# Altium PCB full-bridge-driver.PCBDOC
Units mm, origin at the board's own origin, x right, y up, seen from the top; angles counter-clockwise.
Board outline 535.3 x 360.3 mm, 2 copper layers (Top Layer, Bottom Layer); 32 components, 20 nets, 99 pads, 39 vias.
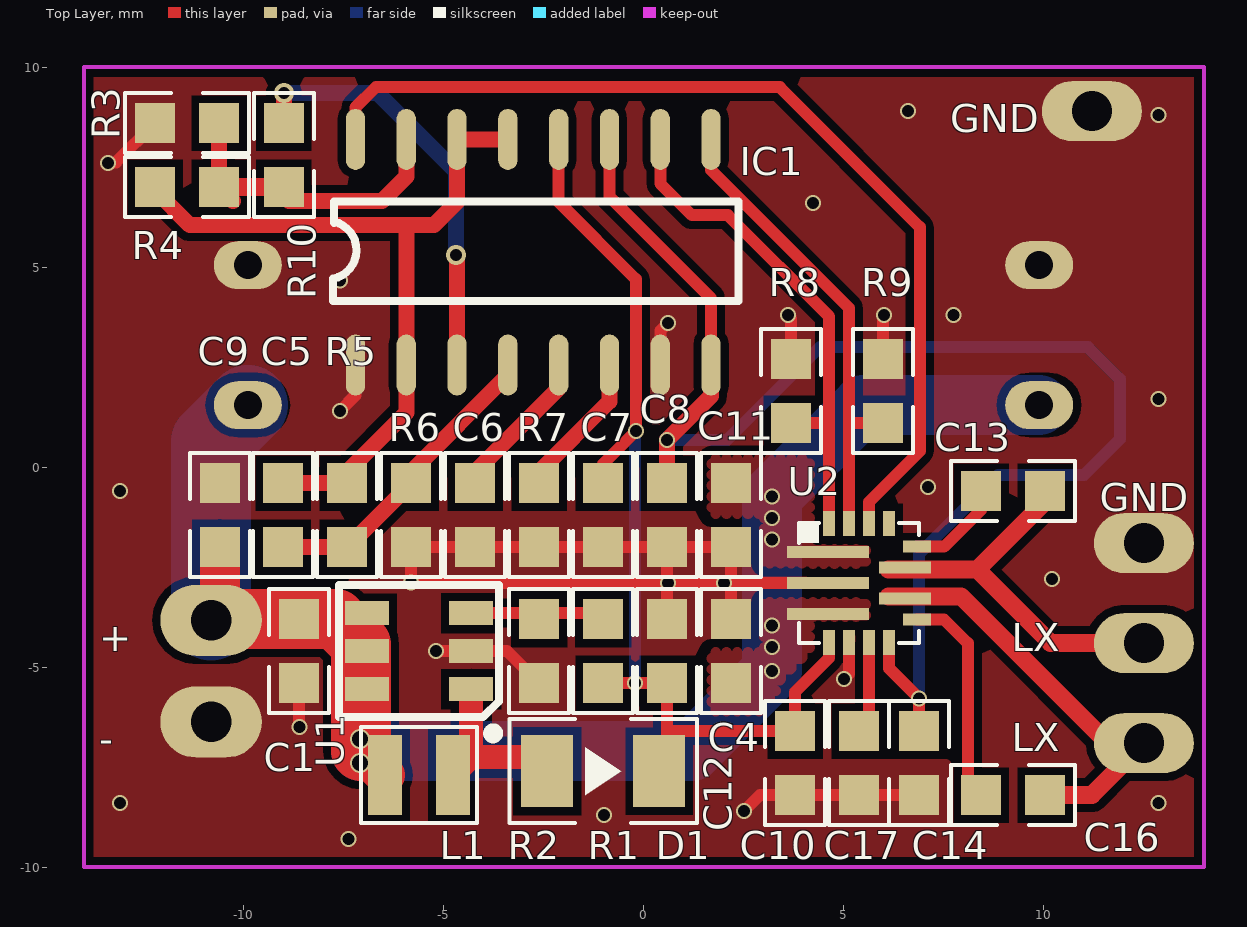
[diagram p0: Top Layer view]
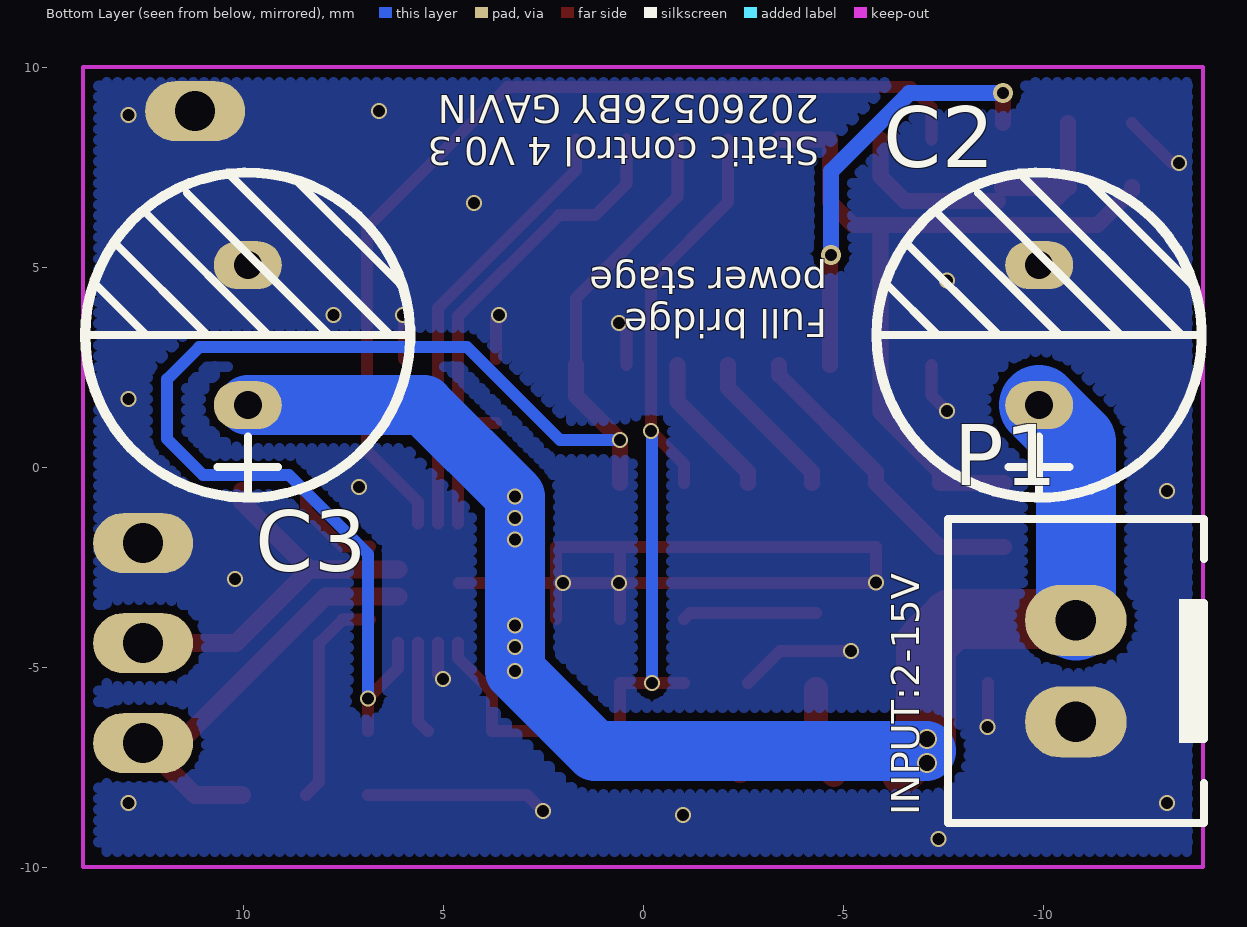
[diagram p1: Bottom Layer view, seen from below]

## Layer stack, top to bottom
Top Solder: solder mask 0.0102, Solder Resist, Dk 3.5
Top Layer: signal copper 0.0356
Dielectric1: dielectric 0.32, FR-4, Dk 4.8
Bottom Layer: signal copper 0.0356
Bottom Solder: solder mask 0.0102, Solder Resist, Dk 3.5

## Board outline
-686.3,-410.801 -686.3,-68.101 -669.7,-51.501 -500.5,-51.501 -159.9,-51.501 -158.9,-50.501 -151,-58.401 -151,-410.801

## Design rules (kind name [scope] priority, off if disabled: settings)
Clearance [All] p1: gap=0.2 ignorepadtopadclearanceinfootprint=FALSE
DiffPairsRouting [All] p1: maxlimit=0.254 minlimit=0.152 mostfreqgap=0.152 substack1={621AFB14-A615-4A07-81E7-C7BBE0B83DBB} toplayer_{621afb14-a615-4a07-81e7-c7bbe0b83dbb}_minwidth=0.381 toplayer_{621afb14-a615-4a07-81e7-c7bbe0b83dbb}_maxwidth=0.381 toplayer_{621afb14-a615-4a07-81e7-c7bbe0b83dbb}_prefwidth=0.381 bottomlayer_{621afb14-a615-4a07-81e7-c7bbe0b83dbb}_minwidth=0.381 bottomlayer_{621afb14-a615-4a07-81e7-c7bbe0b83dbb}_maxwidth=0.381 bottomlayer_{621afb14-a615-4a07-81e7-c7bbe0b83dbb}_prefwidth=0.381 substack2={DB479547-C8DA-4607-8AD2-77557D93AA0E} toplayer_{db479547-c8da-4607-8ad2-77557d93aa0e}_minwidth=0.381 toplayer_{db479547-c8da-4607-8ad2-77557d93aa0e}_maxwidth=0.381 toplayer_{db479547-c8da-4607-8ad2-77557d93aa0e}_prefwidth=0.381 bottomlayer_{db479547-c8da-4607-8ad2-77557d93aa0e}_minwidth=0.381 bottomlayer_{db479547-c8da-4607-8ad2-77557d93aa0e}_maxwidth=0.381 bottomlayer_{db479547-c8da-4607-8ad2-77557d93aa0e}_prefwidth=0.381 substack3={D4E7E17C-23B4-49C8-B3C3-BBD1F0C4DA9A} toplayer_{d4e7e17c-23b4-49c8-b3c3-bbd1f0c4da9a}_minwidth=0.381 toplayer_{d4e7e17c-23b4-49c8-b3c3-bbd1f0c4da9a}_maxwidth=0.381 toplayer_{d4e7e17c-23b4-49c8-b3c3-bbd1f0c4da9a}_prefwidth=0.381 bottomlayer_{d4e7e17c-23b4-49c8-b3c3-bbd1f0c4da9a}_minwidth=0.381 bottomlayer_{d4e7e17c-23b4-49c8-b3c3-bbd1f0c4da9a}_maxwidth=0.381 bottomlayer_{d4e7e17c-23b4-49c8-b3c3-bbd1f0c4da9a}_prefwidth=0.381 substack4={AC9A94F5-BCE4-4E8D-8886-9D09281D7992} toplayer_{ac9a94f5-bce4-4e8d-8886-9d09281d7992}_minwidth=0.381 toplayer_{ac9a94f5-bce4-4e8d-8886-9d09281d7992}_maxwidth=0.381 toplayer_{ac9a94f5-bce4-4e8d-8886-9d09281d7992}_prefwidth=0.381 bottomlayer_{ac9a94f5-bce4-4e8d-8886-9d09281d7992}_minwidth=0.381 bottomlayer_{ac9a94f5-bce4-4e8d-8886-9d09281d7992}_maxwidth=0.381 bottomlayer_{ac9a94f5-bce4-4e8d-8886-9d09281d7992}_prefwidth=0.381 substack5={136F8873-FA77-4BAF-BE9C-6B6903ADFA9B} toplayer_{136f8873-fa77-4baf-be9c-6b6903adfa9b}_minwidth=0.381 toplayer_{136f8873-fa77-4baf-be9c-6b6903adfa9b}_maxwidth=0.381 toplayer_{136f8873-fa77-4baf-be9c-6b6903adfa9b}_prefwidth=0.381 bottomlayer_{136f8873-fa77-4baf-be9c-6b6903adfa9b}_minwidth=0.381 bottomlayer_{136f8873-fa77-4baf-be9c-6b6903adfa9b}_maxwidth=0.381 bottomlayer_{136f8873-fa77-4baf-be9c-6b6903adfa9b}_prefwidth=0.381 substack6={AF7F046E-E707-4E8A-A9F1-8993D7C19642} toplayer_{af7f046e-e707-4e8a-a9f1-8993d7c19642}_minwidth=0.381 toplayer_{af7f046e-e707-4e8a-a9f1-8993d7c19642}_maxwidth=0.381 toplayer_{af7f046e-e707-4e8a-a9f1-8993d7c19642}_prefwidth=0.381 bottomlayer_{af7f046e-e707-4e8a-a9f1-8993d7c19642}_minwidth=0.381 bottomlayer_{af7f046e-e707-4e8a-a9f1-8993d7c19642}_maxwidth=0.381 bottomlayer_{af7f046e-e707-4e8a-a9f1-8993d7c19642}_prefwidth=0.381 substack7={800CA7EA-69B8-471F-9DFA-96CAB874F1C3} toplayer_{800ca7ea-69b8-471f-9dfa-96cab874f1c3}_minwidth=0.381 toplayer_{800ca7ea-69b8-471f-9dfa-96cab874f1c3}_maxwidth=0.381 toplayer_{800ca7ea-69b8-471f-9dfa-96cab874f1c3}_prefwidth=0.381 bottomlayer_{800ca7ea-69b8-471f-9dfa-96cab874f1c3}_minwidth=0.381 bottomlayer_{800ca7ea-69b8-471f-9dfa-96cab874f1c3}_maxwidth=0.381 bottomlayer_{800ca7ea-69b8-471f-9dfa-96cab874f1c3}_prefwidth=0.381 toplayer_minwidth=0.2 toplayer_maxwidth=0.381 toplayer_prefwidth=0.381 bottomlayer_minwidth=0.2 bottomlayer_maxwidth=0.381 bottomlayer_prefwidth=0.381 substack8={FC26343C-DB00-4567-9A80-1AB2D5E88558} toplayer_{fc26343c-db00-4567-9a80-1ab2d5e88558}_minwidth=0.381 toplayer_{fc26343c-db00-4567-9a80-1ab2d5e88558}_maxwidth=0.381 toplayer_{fc26343c-db00-4567-9a80-1ab2d5e88558}_prefwidth=0.381 bottomlayer_{fc26343c-db00-4567-9a80-1ab2d5e88558}_minwidth=0.381 bottomlayer_{fc26343c-db00-4567-9a80-1ab2d5e88558}_maxwidth=0.381 bottomlayer_{fc26343c-db00-4567-9a80-1ab2d5e88558}_prefwidth=0.381 substack9={B01DD4FC-86BE-4466-8095-FDAEFA45B03F} toplayer_{b01dd4fc-86be-4466-8095-fdaefa45b03f}_minwidth=0.381 toplayer_{b01dd4fc-86be-4466-8095-fdaefa45b03f}_maxwidth=0.381 toplayer_{b01dd4fc-86be-4466-8095-fdaefa45b03f}_prefwidth=0.381 bottomlayer_{b01dd4fc-86be-4466-8095-fdaefa45b03f}_minwidth=0.381 bottomlayer_{b01dd4fc-86be-4466-8095-fdaefa45b03f}_maxwidth=0.381 bottomlayer_{b01dd4fc-86be-4466-8095-fdaefa45b03f}_prefwidth=0.381 maxuncoupledlength=12.7
FabricationTestPointUsage TestPointUsage [All] p1: valid=0 allowmultiple=FALSE
FabricationTestpoint Testpoint [All] p1: side=3 testpointundercomponent=TRUE minsize=1.016 maxsize=2.54 preferedsize=1.524 minholesize=0 maxholesize=1.016 preferedholesize=0.813 testpointgrid=0.025 allowsidetop=TRUE allowsidebottom=TRUE usegrid=TRUE gridtolerance=0
Height [All] p1: minheight=0 maxheight=30 prefheight=12.7
HoleSize [All] p1: absolutevalues=TRUE maxlimit=5 minlimit=0.025 maxpercent=80.000 minpercent=20.000
PlaneConnect [All] p1: planeconnectstyle=Direct reliefexpansion=0.508 reliefentries=4 reliefconductorwidth=0.7 reliefairgap=0.254
PolygonConnect Via [IsVia] p1: connectstyle=Direct reliefconductorwidth=0.6 reliefentries=4 polygonreliefangle="90 Angle" airgapwidth=0.254
PolygonConnect PolygonConnect_1 [All] p2: connectstyle=Direct reliefconductorwidth=0.7 reliefentries=4 polygonreliefangle="90 Angle" airgapwidth=0.254
RoutingVias [All] p1: holewidth=0.6 width=1 viastyle="Through Hole" minholewidth=0.2 minwidth=0.4 maxholewidth=5 maxwidth=7
SolderMaskExpansion [All] p1: expansion=0.102 istentingtop=FALSE
SupplyNets "Schematic Supply Nets_4" [InNet('5V0')] p1: voltage=0.000
SupplyNets "Schematic Supply Nets_3" [InNet('GND')] p2: voltage=0.000
SupplyNets "Schematic Supply Nets_2" [InNet('VX')] p3: voltage=0.000
SupplyNets "Schematic Supply Nets_1" [InNet('13V')] p4: voltage=0.000
SupplyNets "Schematic Supply Nets" [InNet('3V3')] p5: voltage=0.000
Width [All] p1: maxlimit=10 minlimit=0.2 preferedwidth=0.2 substack1={621AFB14-A615-4A07-81E7-C7BBE0B83DBB} substack2={DB479547-C8DA-4607-8AD2-77557D93AA0E} substack3={D4E7E17C-23B4-49C8-B3C3-BBD1F0C4DA9A} substack4={AC9A94F5-BCE4-4E8D-8886-9D09281D7992} substack5={136F8873-FA77-4BAF-BE9C-6B6903ADFA9B} substack6={AF7F046E-E707-4E8A-A9F1-8993D7C19642} substack7={800CA7EA-69B8-471F-9DFA-96CAB874F1C3} substack8={FC26343C-DB00-4567-9A80-1AB2D5E88558} substack9={B01DD4FC-86BE-4466-8095-FDAEFA45B03F} minimp=50.000000 maximp=50.000000 favimp=50.000000
24 further rules are at their usual default settings.

## Components (designator, comment, footprint, x,y, rotation, side; value= is the part's Value field where it differs from the comment)
C1 "10UF" C1608-0603N -8.616,-4.6 r270 top
C2 "16V/470UF" "EC_8mm - 3.5MM" -9.9,3.3 r90 bottom value=100pF
C3 "16V/470UF" "EC_8mm - 3.5MM" 9.884,3.3 r90 bottom value=100pF
C4 "10UF" C1608-0603N 0.584,-4.6 r90 top
C5 "1UF" C1608-0603N -9.016,-1.2 r90 top
C6 "10NF" C1608-0603N -4.216,-1.2 r90 top
C7 "1UF" C1608-0603N -1.016,-1.2 r270 top
C8 "1UF" C1608-0603N 0.584,-1.2 r90 top
C9 "ESD" C1608-0603N -10.6,-1.2 r90 top
C10 "1UF" C1608-0603N 3.784,-7.4 r90 top
C11 "1UF" C1608-0603N 2.184,-1.2 r90 top
C12 "1UF" C1608-0603N 2.184,-4.6 r90 top
C13 "1UF" C1608-0603N 9.234,-0.6 r180 top
C14 "10UF" C1608-0603N 6.884,-7.4 r90 top
C16 "1UF" C1608-0603N 9.234,-8.2 r180 top
C17 "1UF" C1608-0603N 5.384,-7.4 r90 top
D1 "K34" DIODE_1206N -1.016,-7.6 r0 top
IC1 "TL494" SOP16 -2.716,5.4 r270 top
L1 "10UH" 252010 -5.616,-7.7 r0 top
P1 "" XHB_2pin_2.54mm -10.816,-5.1 r270 bottom
R1 "200K1%" C1608-0603N -1.016,-4.6 r90 top
R2 "10K 1%" C1608-0603N -2.616,-4.6 r270 top
R3 "1K" C1608-0603N -11.416,8.6 r0 top
R4 "3.57K" C1608-0603N -11.416,7 r0 top
R5 "10K" C1608-0603N -7.416,-1.2 r90 top
R6 "4.7K" C1608-0603N -5.816,-1.2 r90 top
R7 "1.5K" C1608-0603N -2.616,-1.2 r90 top
R8 "100K" C1608-0603N 3.684,1.9 r90 top
R9 "100K" C1608-0603N 5.984,1.9 r90 top
R10 "470R" C1608-0603N -9,7.8 r270 top
U1 "SX1308" SOT23-6 -5.616,-4.6 r90 top
U2 "SCT63140" FCQFN-15L 5.384,-2.9 r0 top

## Footprints (in the part's own frame and the unit in brackets; to place one, negate y for a bottom-side part, rotate by r counter-clockwise, add the part's x,y. Pads: shape width x height; smd on the part's side, far side on the other; paste and mask are expansions set on the pad)
252010 [mm]
  rect 0.85x2 smd: 1(-0.85,0) 2(0.85,0)
  silkscreen extent -1.45,-1.2 1.45,1.2
C1608-0603N [mm]
  rect 1x1 smd: 1(-0.8,0) 2(0.8,0)
  silkscreen extent -1.55,-0.75 1.55,0.75
DIODE_1206N [mm]
  rect 1.295x1.8 smd: 1(-1.4,0) 2(1.4,0)
  silkscreen extent -2.35,-1.3 2.35,1.3
"EC_8mm - 3.5MM" [mm]
  oval 1.2x1.7 hole 0.7: 1(-1.75,0) 2(1.75,0)
  silkscreen extent -4.06,-4.06 4.06,4.06
FCQFN-15L [mm]
  rect 2.05x0.3 smd: 1(-0.775,0.775) 2(-0.775,0) 3(-0.775,-0.775)
  rect 0.3x0.625 smd: 4(-0.75,-1.488) 5(-0.25,-1.488) 6(0.25,-1.488) 7(0.75,-1.488) 12(0.75,1.488) 13(0.25,1.488) 14(-0.25,1.488) 15(-0.75,1.488)
  rect 0.7x0.3 smd: 8(1.45,-0.912) 11(1.45,0.912)
  rect 1.3x0.3 smd: 9(1.15,-0.387) 10(1.15,0.387)
  silkscreen extent -1.5,-1.5 1.5,1.5
SOP16 [mil]
  oval 60x19 smd: 1(112.09,-176.82) 2(112.09,-126.82) 3(112.09,-76.82) 4(112.09,-26.82) 5(112.09,23.18) 6(112.09,73.18) 7(112.09,123.18) 8(112.09,173.18) 9(-109.91,173.18) 10(-109.91,123.18) 11(-109.91,73.18) 12(-109.91,23.18) 13(-109.91,-26.82) 14(-109.91,-76.82) 15(-109.91,-126.82) 16(-109.91,-176.82)
  silkscreen extent -49,-199 49,200
SOT23-6 [mm]
  rect 0.6x1.1 smd: 1(-0.95,-1.3) 2(0,-1.3) 3(0.95,-1.3) 4(0.95,1.3) 5(0,1.3) 6(-0.95,1.3)
  silkscreen extent -2.18,-2 1.65,2
XHB_2pin_2.54mm [mil]
  oval 70x100 hole 40: 1(-50,0) 2(50,0)
  silkscreen extent -150,-126 150,126

## Part data
C1 C4 C5 C6 C7 C8 C10 C11 C12 C13 C14 C16 C17: library part Cap, "Capacitor", Manufacturer="Generic Components", Class=Passive, Published=08/06/2000, Publisher="Altium Hobart Technology Centre", SubClass=Capacitor
C2 C3: library part "Cap Pol3", "Polarized Capacitor (Surface Mount)", LatestRevisionDate=29-May-2009, LatestRevisionNote="IPC-7351 Footprint Added.", PackageDescription="Chip Capacitor", PackageReference=C0805, Published=8-Jun-2000, Publisher="Altium Limited"
C9: library part Cap, "压敏电阻", 封装=0603
D1: library part Diode, "Default Diode", Manufacturer="Generic Components", Class=Discrete, Published=08/06/2000, Publisher="Altium Hobart Technology Centre", SubClass="Diode - Switching"
L1: library part Inductor, "Inductor", Code_IEC=1005, Code_JEITA=0402, LatestRevisionDate=17-Jul-2002, LatestRevisionNote="Re-released for DXP Platform.", PackageReference=0402-A, Published=8-Jun-2000, Publisher="Altium Limited"
P1: library part "Header 2", "Header, 2-Pin", LatestRevisionDate=17-Jul-2002, LatestRevisionNote="Re-released for DXP Platform.", Publisher="Altium Limited"
R1 R2 R3 R4 R5 R6 R7 R8 R9 R10: library part Res1, "Resistor", Manufacturer="Generic Components", Class=Passive, Published=08/06/2000, Publisher="Altium Hobart Technology Centre", SubClass=Resistor

## Free pads (board coordinates)
  oval 2.5x1.5 hole 1: 2(11.2,8.9) 2(12.5,-6.9) 2(12.5,-4.4) 2(12.5,-1.9)

## Via types
v1: diameter 0.4, hole 0.3, Top Layer to Bottom Layer, 35 vias
v2: diameter 0.5, hole 0.3, Top Layer to Bottom Layer, 2 vias
v3: diameter 0.5, hole 0.4, Top Layer to Bottom Layer, 2 vias

## Nets (pads, with @x,y where several pads share a name; then routed paths per layer and width w, separated by ;. In a path a pad name is that pad's centre, name@x,y a point inside that pad or via, vN(x,y) a via of type N, cw(c..) or ccw(c..) an arc to the next point about the centre after c; other vN are vias at no path point)
3V3: C17.2 U2.6 | length 2.3
  Top Layer w0.3: C17.2 5.634,-6.35 U2.6
5V0: C8.2 C14.2 IC1.8 IC1.11 U2.7 | length 36.5
  Top Layer w0.3: IC1.11 -0.857,6.757 1.683,4.217 IC1.8 ; U2.7 6.134,-5.034 v1(6.884,-5.784) C14.2
  Top Layer w0.4: C8.2 v1(0.584,0.684) 1.683,1.783 IC1.8
  Bottom Layer w0.3: v1(0.584,0.684) 2.084,0.684 4.4,3 11.1,3 11.9,2.2 11.9,0.7 11,-0.2 8.85,-0.2 6.884,-2.166 v1(6.884,-5.784)
13V: C4.1 C7.1 C10.2 D1.2 IC1.12 R1.1 U2.4 | length 25.7
  Top Layer w0.3: IC1.12 -2.127,6.627 -0.2,4.7 v1(-0.2,0.9) -1.016,0.084 C7.1 ; R1.1 v1(-0.216,-5.4) C4.1 0.584,-6.6 ; D1.2 0.584,-7.4 0.584,-6.6 ; U2.4 4.634,-4.766 3.784,-5.616 C10.2 0.584,-6.6
  Bottom Layer w0.3: v1(-0.216,-5.4) -0.216,0.884 v1(-0.2,0.9)
FB: IC1.16 U2.13 | length 24.5
  Top Layer w0.3: IC1.16 -7.207,8.993 -6.7,9.5 3.4,9.5 6.9,6 6.9,0.4 5.634,-0.866 U2.13
GND: C1.2 C2.2 C3.2 C4.2 C6.1 C7.2 C8.1 C9.2 C10.1 C11.1 C12.2 C14.1 C17.1 IC1.1 IC1.7 P1.2 pad.2@11.2,8.9 pad.2@12.5,-1.9 R2.2 R3.1 R6.1 R7.1 R8.2 R9.2 U1.2 U2.2 U2.5 | length 38.7
  Top Layer w0.3: v1(-13.4,7.6) -13.381,7.619 -13.197,7.619 R3.1 ; C1.2 -8.616,-6.484 v1@-8.6,-6.5 ; v1(-7.6,1.4) -7.207,1.793 IC1.1 ; v1(-5.2,-4.6) U1.2 -3.416,-4.6 R2.2 ; IC1.7 0.413,3.413 v1(0.6,3.6) ; C4.2 v1@0.584,-2.9 ; C12.2 v1@2.184,-2.9 ; v1(2.5,-8.6) 2.9,-8.2 C17.1 C14.1 ; v1(3.6,3.8) 3.684,3.716 R8.2 ; U2.2 v1@2.184,-2.9 ; v1(5,-5.3) 5.134,-5.166 U2.5 ; R9.2 5.984,3.784 v1(6,3.8) ; v1@0.584,-2.9 C8.1 ; v1@0.584,-2.9 v1(0.6,-2.9) v1(2,-2.9) v1@2.184,-2.9 ; v1@0.584,-2.9 -5.8,-2.9 v1(-5.816,-2.884) R6.1 C6.1 R7.1 C7.2 C8.1 ; C8.1 C11.1 v1@2.184,-2.9
  other v1: -7.382,-9.3 -1,-8.7 -13.1,-8.4 12.868,-8.4 -8.608,-6.492 10.2,-2.8 -13.1,-0.6 7.1,-0.5 12.868,1.7 7.738,3.8 -7.6,4.668 4.228,6.6 12.868,8.8 6.6,8.9
NetC5_1: C5.1 IC1.4 R5.1 R6.2 | length 7.8
  Top Layer w0.4: C5.1 R5.1 R6.2 -5.816,-0.116 -3.397,2.303 IC1.4
NetC6_2: C6.2 IC1.5 | length 3.8
  Top Layer w0.4: C6.2 -4.216,-0.116 -2.127,1.973 IC1.5
NetC13_1: C13.1 pad.2@12.5,-4.4 U2.10 | length 9.8
  Top Layer w0.45: U2.10@6.118,-2.563 8.337,-2.563 ; C13.1 10.034,-0.866 8.337,-2.563 ; pad.2@12.5,-4.4 10.174,-4.4 8.337,-2.563
NetC13_2: C13.2 U2.11 | length 2.4
  Top Layer w0.3: U2.11 7.512,-1.988 8.434,-1.066 C13.2
NetC16_1: C16.1 pad.2@12.5,-6.9 U2.9 | length 10.8
  Top Layer w0.45: U2.9@6.118,-3.237 7.937,-3.237 11.7,-7 pad.2@12.4,-7 ; C16.1 11.2,-8.2 pad.2@12.4,-7 ; pad.2@12.5,-6.9 pad.2@12.4,-7
NetC16_2: C16.2 U2.8 | length 5.4
  Top Layer w0.3: U2.8 7.512,-3.812 8.1,-4.4 8.1,-7.866 C16.2
NetD1_1: D1.1 L1.2 U1.1 | length 4.4
  Top Layer w0.6: L1.2 -4.316,-7.25 ; U1.1 -4.316,-7.25 ; D1.1 -2.766,-7.25 -4.316,-7.25
NetIC1_3: IC1.3 R10.1 | length 10.7
  Top Layer w0.4: R10.1 v2(-9,9.35) ; v2(-4.7,5.3) -4.667,5.267 IC1.3
  Bottom Layer w0.4: v2(-9,9.35) -6.65,9.35 -4.7,7.4 v2(-4.7,5.3)
NetIC1_6: IC1.6 R7.2 | length 3.7
  Top Layer w0.4: R7.2 -2.616,-0.116 -0.857,1.643 IC1.6
NetIC1_15: IC1.15 R3.2 R4.2 R10.2 | length 7.8
  Top Layer w0.4: R3.2 R4.2 R4.2@-10.266,6.65 ; R10.2@-8.866,6.65 -6.55,6.65 -5.937,7.263 IC1.15
  Top Layer w0.45: R4.2 R10.2
NetR1_2: R1.2 R2.1 U1.3 | length 3.4
  Top Layer w0.3: U1.3 -1.166,-3.65 R1.2
PWM1: IC1.10 R8.1 U2.15 | length 12.8
  Top Layer w0.3: IC1.10 0.413,7.087 1.2,6.3 2.1,6.3 4.634,3.766 4.634,1.1 ; R8.1 4.634,1.1 ; U2.15 4.634,1.1
PWM2: IC1.9 R9.1 U2.14 | length 11.9
  Top Layer w0.3: IC1.9 1.683,7.424 5.134,3.973 5.134,1.1 ; U2.14 5.134,1.1 ; R9.1 5.134,1.1
REF: C5.2 IC1.2 IC1.13 IC1.14 R4.1 R5.2 | length 19.7
  Top Layer w0.4: R4.1 -12.216,6.916 -11.35,6.05 -5.9,6.05 ; C5.2 R5.2 -7.416,-0.116 -5.937,1.363 IC1.2 -5.937,6.013 -5.9,6.05 ; IC1.13 IC1.14 -4.667,6.633 -5.25,6.05 -5.9,6.05
VX: C1.1 C2.1 C3.1 C9.1 C11.2 C12.1 L1.1 P1.1 U1.4 U1.5 U1.6 U2.1 U2.3 | length 38.5
  Top Layer w0.6: C1.1 C1.1@-8.466,-3.65
  Top Layer w1: P1.1 -10.6,-3.614 C9.1 ; -7.066,-7.1 L1.1
  Top Layer w1.5: P1.1@-10.786,-3.8 C1.1 -7.7,-3.8 -7.066,-4.434 -7.066,-7.1
  Bottom Layer w1.5: -7.066,-7.1 1.2,-7.1 v1(3.2,-5.1) v1(3.2,-4.5) v1(3.2,-3.96) v1(3.2,-1.812) v1(3.2,-1.272) v1(3.2,-0.732) 5.482,1.55 C3.1
  Bottom Layer w2: P1.1 -10.816,0.634 C2.1
  other v3: -7.1,-7.4 -7.1,-6.8
pads on no net: U2.12

## Polygon pours and split planes (outlines as drawn)
GND on Top Layer "Bottom Layer-No Net" (solid, remove dead copper, pour order 48): -14,10 14,10 14,-10 -14,-10
VX on Top Layer "Bottom Layer-No Net" (hatched 90Degree grid 0.27 track 0.27, remove dead copper, pour order 42): 4.149,-1.812 5.6,-1.812 5.6,-3.9 4.221,-3.9 4.149,-3.972
VX on Top Layer "Bottom Layer-No Net" (hatched 90Degree grid 0.27 track 0.27, remove dead copper, pour order 36): 1.7,-6.1 4.634,-6.1 4.634,-2.925 4.609,-2.9 2.9,-2.9 2.9,-4.5 1.7,-4.5
VX on Top Layer "Bottom Layer-No Net" (hatched 90Degree grid 0.27 track 0.27, remove dead copper, pour order 34): 1.7,-1.4 2.7,-2.4 3.7,-2.4 4.5,-2.4 4.6,-2.3 4.6,0.2 1.7,0.2
GND on Bottom Layer "Bottom Layer-No Net" (hatched 90Degree grid 0.27 track 0.27, remove dead copper, pour order 50): -14,10 14,10 14,-10 -14,-10

## Keep-outs
Keep-Out Layer:
  lines w0.1: -14,-10 -14,10 14,10 14,-10 -14,-10

## Silkscreen, mask and mechanical layers (free items; w line width, h text height)
Top Overlay:
  text "GND" at 7.668,8.368 h0.7
  text "GND" at 11.4,-1.1 h0.7
  text "+" at -13.615,-4.6 h0.7
  text "LX" at 9.2,-4.6 h0.7
  text "LX" at 9.2,-7.1 h0.7
  text "-" at -13.615,-7.14 h0.7
Bottom Overlay:
  text "Static control 4 V0.3 / 20260526BY GAVIN" at -4.4,9.3 h0.7 r180
  text "Full bridge / power stage" at -4.6,5 h0.7 r180
  text "INPUT:2-15V" at -6.9,-8.7 h0.7 r270
Top Solder:
  rectangle: 2.934,-5 3.884,-3.425
  rectangle: 2.934,-2.375 3.884,-0.225